# EAGLE board nodemcu (EAGLE 9.5.2)
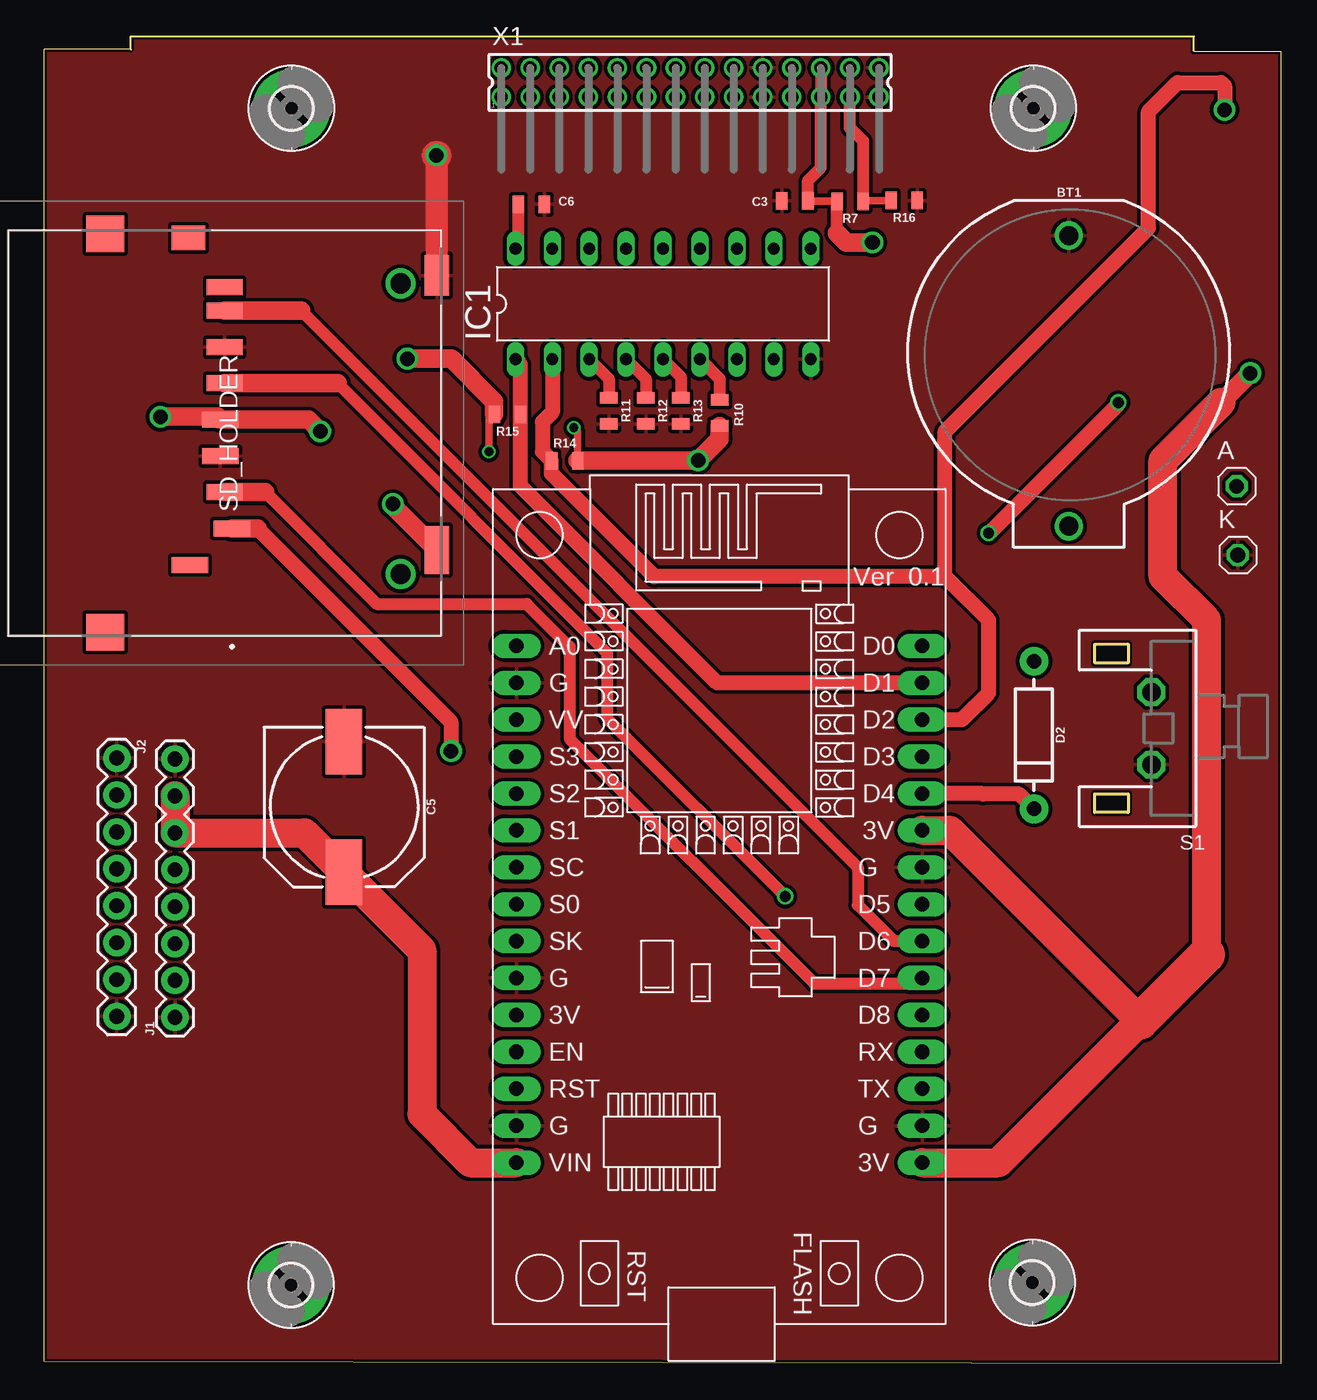
[diagram p0: board, top side]
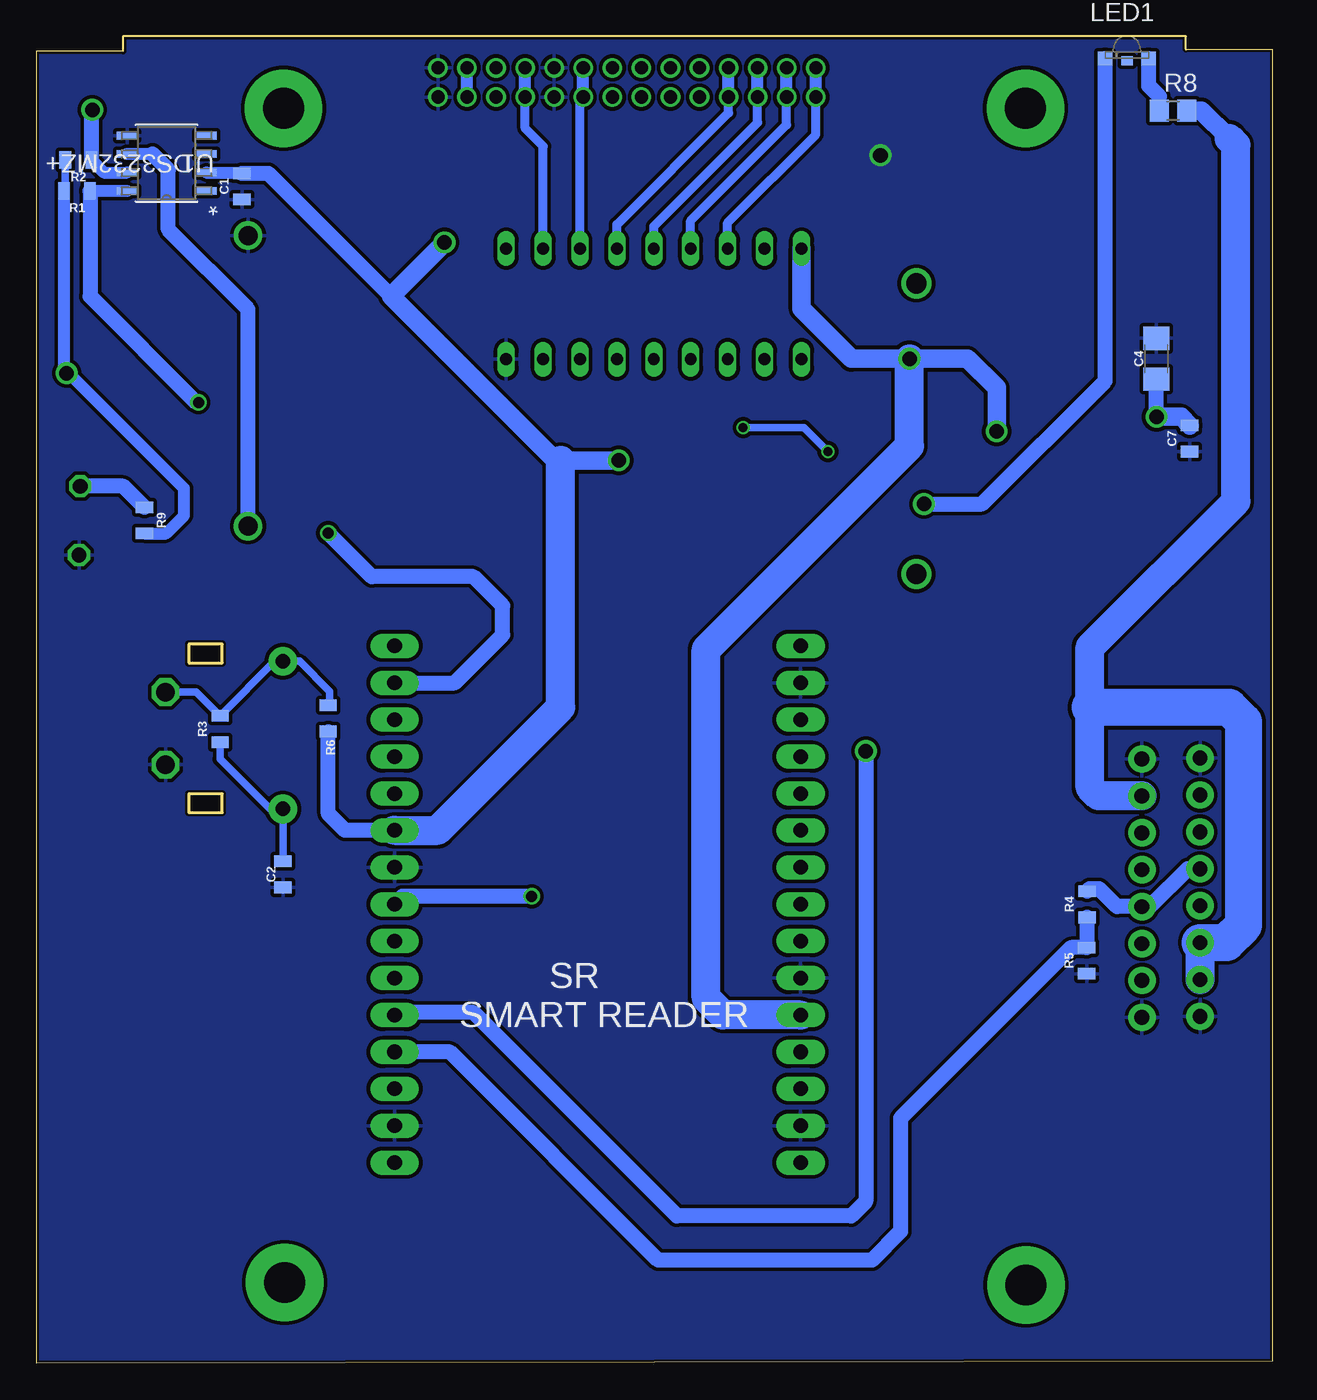
[diagram p1: board, bottom side, seen from below]

Size 85.09 x 91.31 mm. Coordinates in mm from the lower left corner, seen from the top.
Outline: 5.97,91.31 79.12,91.31 79.12,90.3 85.09,90.3 85.09,0 0,0.13 0,90.42 5.97,90.42 5.97,91.31
Copper layers (1*16): Top 0.035mm / dielectric 1.5mm / Bottom 0.035mm
Design rules "SparkFun-2-layer-PCBWay-LIMIT": minimum track width 6mil, minimum drill 0.3mm, track to track 6mil, track to pad 6mil, pad to pad 6mil, via to via 6mil, smd to smd 6mil, copper to edge 6mil, drill to drill 6mil, minimum pad ring 6mil, minimum via ring 6mil, stop-mask expansion 4mil, vias tented up to drill 25mil, thermal gap 10mil
Net classes: 1 signal: width 0.254 mm, drill 0.305 mm, clearance 0.254 mm; 2 power: width 0.508 mm, drill 0.61 mm, clearance 0.254 mm

## Footprints (pad centres in the part's own frame; a part is rotated, then mirrored left to right if it is on the bottom)
1X01 = drill 1.016 octagon: 1 0,0
BATTCOM_20MM_PTH = drill 1.3: 1 11.85,0; 2 -8.15,0
0805 = smd 0.8 x 1.2: 1 -0.9,0; 2 0.9,0
1206 = smd 1.6 x 1.8: 1 -1.4,0; 2 1.4,0
NIC_10X10.5_CAP = smd 4.5 x 2.5: + 4.5,0; - -4.5,0
DIODE-1N4001 = drill 1 pad 1.981: A -5.08,0; C 5.08,0
2,8-PAD = drill 2.8 pad 5.334: B2,8 0,0
DIL18 = drill 0.813 long: 1 -10.16,-3.81; 2 -7.62,-3.81; 3 -5.08,-3.81; 4 -2.54,-3.81; 5 0,-3.81; 6 2.54,-3.81; 7 5.08,-3.81; 8 7.62,-3.81; 9 10.16,-3.81; 10 10.16,3.81; 11 7.62,3.81; 12 5.08,3.81; 13 2.54,3.81; 14 0,3.81; 15 -2.54,3.81; 16 -5.08,3.81; 17 -7.62,3.81; 18 -10.16,3.81
1X08 = drill 1.016 pad 1.88: 1 0,0; 2 2.54,0; 3 5.08,0; 4 7.62,0; 5 10.16,0; 6 12.7,0; 7 15.24,0; 8 17.78,0
OSRAM-SIDELED = smd 1 x 0.9: A 1.5,0; C -1.5,0 | smd 0.8 x 0.6: P$1 0,-0.15
R0805 = smd 1.3 x 1.5: 1 -0.95,0; 2 0.95,0
TL1100C = drill 1.27 octagon: 1 2.5,0; 2 -2.5,0
5009980900 = smd 1.1 x 2.5: 1 -6.575,-0.225; 2 -4.075,0.275; 3 -1.575,0.575; 4 0.925,0.575; 5 3.425,0.275; 6 5.925,0.275; 7 8.425,0.275; 8 10.05,0.275; 9 -9.075,2.675 | smd 1.7 x 2.3: 10 13.425,2.775 | smd 2.8 x 1.7: 11 10.85,-14.325 | smd 3.3 x 1.7: 12 -8.05,-14.325 | smd 2.5 x 2.6: 13 -13.7,8.495; 14 13.7,8.495 | drill 1.39 pad 2.085: 15 -9.7,-11.825; 16 10.3,-11.825
21-0041B_8 = smd 1.455 x 0.543: 1 -2.721,1.905; 2 -2.721,0.635; 3 -2.721,-0.635; 4 -2.721,-1.905; 5 2.721,-1.905; 6 2.721,-0.635; 7 2.721,0.635; 8 2.721,1.905
NODEMCU = drill 1 pad 1.676 long: 1 -13.97,17.78; 2 -13.97,15.24; 3 -13.97,12.7; 4 -13.97,10.16; 5 -13.97,7.62; 6 -13.97,5.08; 7 -13.97,2.54; 8 -13.97,0; 9 -13.97,-2.54; 10 -13.97,-5.08; 11 -13.97,-7.62; 12 -13.97,-10.16; 13 -13.97,-12.7; 14 -13.97,-15.24; 15 -13.97,-17.78; 16 13.97,-17.78; 17 13.97,-15.24; 18 13.97,-12.7; 19 13.97,-10.16; 20 13.97,-7.62; 21 13.97,-5.08; 22 13.97,-2.54; 23 13.97,0; 24 13.97,2.54; 25 13.97,5.08; 26 13.97,7.62; 27 13.97,10.16; 28 13.97,12.7; 29 13.97,15.24; 30 13.97,17.78
332-28 = drill 0.9 pad 1.27: 1 -13,-1; 2 -13,1; 3 -11,-1; 4 -11,1; 5 -9,-1; 6 -9,1; 7 -7,-1; 8 -7,1; 9 -5,-1; 10 -5,1; 11 -3,-1; 12 -3,1; 13 -1,-1; 14 -1,1; 15 1,-1; 16 1,1; 17 3,-1; 18 3,1; 19 5,-1; 20 5,1; 21 7,-1; 22 7,1; 23 9,-1; 24 9,1; 25 11,-1; 26 11,1; 27 13,-1; 28 13,1

## Placement (x,y rotation side)
A  [1X01]  82.07,60.35 0 top
BT1  [BATTCOM_20MM_PTH]  70.52,69.45 270 top
C1  0.1µF  [0805]  70.94,80.99 90 bottom
C2  1uF  [0805]  68.11,33.64 270 bottom
C3  .1uF  [0805]  51.67,79.99 0 top
C4  1.0uF  [1206]  8,69.13 90 bottom
C5  470uF  [NIC_10X10.5_CAP]  20.63,38.28 270 top
C6  0.1uF  [0805]  33.53,79.76 0 top
C7  0.1µF  [0805]  5.71,63.64 90 bottom
D2  1A/50V/1.1V  [DIODE-1N4001]  68.12,43.23 270 top
H1  MOUNT-PAD-ROUND2.8  [2,8-PAD]  17.02,86.36 0 top
H2  MOUNT-PAD-ROUND2.8  [2,8-PAD]  68.07,86.36 0 top
H3  MOUNT-PAD-ROUND2.8  [2,8-PAD]  16.99,5.38 0 top
H4  MOUNT-PAD-ROUND2.8  [2,8-PAD]  68,5.55 0 top
IC1  MCP23008/P  [DIL18]  42.59,72.9 0 top
J1  [1X08]  9,23.8 90 top
J2  [1X08]  5,41.64 270 top
K  [1X01]  82.15,55.61 0 top
LED1  [OSRAM-SIDELED]  10.03,89.79 0 bottom
R1  4k7  [0805]  82.29,80.69 180 bottom
R2  4k7  [0805]  82.2,82.81 180 bottom
R3  4k7  [0805]  72.44,43.64 90 bottom
R4  1K  [0805]  12.78,31.58 90 bottom
R5  2K  [0805]  12.8,27.7 90 bottom
R6  20k  [0805]  65.01,44.37 270 bottom
R7  48.7K  [0805]  55.47,79.96 180 top
R8  330  [R0805]  6.85,86.2 0 bottom
R9  100  [0805]  77.66,58.01 270 bottom
R10  4k7  [0805]  46.48,65.41 90 top
R11  10k  [0805]  38.86,65.53 270 top
R12  10k  [0805]  41.4,65.53 270 top
R13  10k  [0805]  43.81,65.53 270 top
R14  4k7  [0805]  35.81,62.1 0 top
R15  4k7  [0805]  31.88,65.3 180 top
R16  45.3R  [0805]  59.18,80.01 180 top
S1  TL1100C  [TL1100C]  76.2,43.69 90 top
SD_HOLDER  500998-0900  [5009980900]  12.7,64.01 90 top
U1  DS3232MZ+  [21-0041B_8]  76.12,82.58 180 bottom
U$1  NODEMCU  [NODEMCU]  46.46,31.58 0 top
X1  332-28  [332-28]  44.45,88.14 0 top

## Library data of the parts
A K = pinhead
BT1 = SparkFun-Batteries; PROD_ID: BATT-09031; SF_SKU: PRT-00783
C1 C7 = SparkFun-Capacitors; PROD_ID: CAP-08469
C2 C3 C6 = SparkFun-Capacitors; PROD_ID: CAP-08064
C4 = SparkFun-Capacitors; PROD_ID: CAP-09822
C5 = SparkFun-Capacitors; PROD_ID: CAP-08362
D2 = SparkFun-DiscreteSemi; PROD_ID: DIO-09176
H1-H4 = holes
IC1 LED1 = adafruit
J1 J2 = SparkFun-Connectors; PROD_ID: CONN-08438
R1-R7 R9-R16 = SparkFun-Resistors; PROD_ID: RES-09883
R8 = rcl; SPICEPREFIX: R
S1 = switch-e-switch
SD_HOLDER = SamacSys_Parts; ALLIED_NUMBER: 70266950; ALLIED_PRICE-STOCK: https://www.alliedelec.com/molex-incorporated-500998-0900/70266950/; DESCRIPTION: 9 way normal mount SD card connector 9 way normal mount SD card connector; HEIGHT: 3mm; MANUFACTURER_NAME: Molex; MANUFACTURER_PART_NUMBER: 500998-0900; MOUSER_PART_NUMBER: 538-500998-0900; MOUSER_PRICE-STOCK: https://www.mouser.com/Search/Refine.aspx?Keyword=538-500998-0900; RS_PART_NUMBER: 4879327; RS_PRICE-STOCK: http://uk.rs-online.com/web/p/products/4879327
U1 = ds3232; BUILT_BY: EMA_UL_Team; MANUFACTURER_PART_NUMBER: DS3232MZ+; VENDOR: Maxim Integrated Products
U$1 = nodemcu
X1 = con-garry

## Nets
3.3V [power]: C1.2 C3.2 C4.1 C6.1 C7.2 IC1.18 R1.2 R2.2 R6.2 R7.2 R9.2 R10.1 R14.2 R15.2 SD_HOLDER.4 U1.2 U$1.11 U$1.16 U$1.25 X1.23 X1.24
BUTTON [power]: C2.1 D2.C R3.1 U$1.26
CLK [signal]: SD_HOLDER.5 U$1.23
CS [signal]: SD_HOLDER.1 U$1.20
D4_LCD [signal]: IC1.13 X1.7 X1.8
D5_LCD [signal]: IC1.14 X1.5 X1.6
D6_LCD [signal]: IC1.15 X1.3 X1.4
D7_LCD [signal]: IC1.16 X1.1 X1.2
EN_LCD [signal]: IC1.12 X1.17 X1.18
ESP_RX [signal]: R4.1 R5.2 U$1.19
GND [power]: BT1.2 C1.1 C2.2 C3.1 C4.2 C5.- C6.2 C7.1 IC1.9 J1.1 J1.8 J2.1 J2.8 K.1 R5.1 R11.2 R12.2 R13.2 R16.1 S1.2 SD_HOLDER.3 SD_HOLDER.6 SD_HOLDER.11 U1.5 U$1.2 U$1.10 U$1.14 U$1.17 U$1.24 X1.19 X1.20 X1.27 X1.28
MISO [signal]: SD_HOLDER.7 U$1.22
MOSI [signal]: SD_HOLDER.2 U$1.21
N$1: D2.A R3.2 R6.1 S1.1
N$3 [power]: A.1 R9.1
N$4: IC1.6 R10.2
N$5: IC1.3 R11.1
N$6 [signal]: R7.1 R16.2 X1.25 X1.26
N$7: IC1.4 R12.1
N$8: IC1.5 R13.1
N$25: LED1.C SD_HOLDER.12
N$31 [power]: LED1.A R8.1
RS [signal]: IC1.11 X1.21 X1.22
SCL [signal]: IC1.1 R1.1 R15.1 U1.8 U$1.29
SDA [signal]: IC1.2 R2.1 R14.1 U1.7 U$1.28
TX_MIDMARK [power]: J1.4 J2.4 R4.2
VBAT [power]: BT1.1 U1.6
VCC [power]: C5.+ J1.6 J1.7 J2.6 J2.7 R8.2 U$1.15

## Tracks (layer width: path | path; a pad name or v marks a point on that pad's centre or on a via)
3.3V  (via drill 0.61, 1)
  Top 0.508: 32.63,76.9 IC1.18 | R15.2 30.61,64.93 v30.61,62.74 | v36.45,64.39 36.71,64.12 R14.2 | C3.2 52.6,79.96 R7.2
  Top 0.813: C6.1 32.63,76.9 | X1.24 X1.23 53.45,82.28 52.57,81.39 C3.2 | 54.57,77.77 R7.2
  Top 1.27: v83,68.13 81,66.13 | v57,77.13 55.21,77.13 54.57,77.77 | R14.2 36.74,62.13 v45,62.13 46.48,63.61 R10.1 | v25,69.13 28.03,69.13 30.98,66.18 R15.2 | v19,64.13 18.19,64.93 SD_HOLDER.4 11.93,65.13 v8,65.13
  Top 2: U$1.16 65.68,13.8 75.43,23.55 62.32,36.66 U$1.25 | 81,66.13 77,62.13 77,54.13 80,51.13 80,28.13
  Top 2.54: 75.43,23.55 80,28.13
  Bottom 0.508: v36.45,64.39 32.26,64.39 v30.61,62.74 | R2.2 83.1,80.77
  Bottom 0.61: R1.2 83.1,80.77 | 83.19,68.31 v83,68.13
  Bottom 0.813: U1.2 71,81.94 C1.2 | R1.2 83.19,68.31 83.05,68.31 74.93,60.2 74.93,58.33 76.16,57.11 R9.2
  Bottom 1.016: U$1.25 63.84,36.66 65.01,37.83 R6.2 | 60.68,73.44 69.13,81.89 C1.2 | v8,65.13 C4.1
  Bottom 1.27: v57,77.13 60.68,73.44 49,61.76 | 49,62.13 v45,62.13 | v19,64.13 19,67.13 21,69.13 v25,69.13 29,69.13 32.43,72.56 IC1.18 | C7.2 6.3,65.13 v8,65.13
  Bottom 2: U$1.25 57.46,36.66 49,45.13 49,61.76 49,62.13 | U$1.11 37.84,23.96 39,25.13 39,49.13 25,63.13 v25,69.13
BUTTON
  Top 0.508: 64.62,39.16 64.58,39.2
  Top 1.016: D2.C 67.11,39.16 64.62,39.16 | 64.58,39.2 U$1.26
  Bottom 0.508: R3.1 72.44,41.57 69,38.13 68.14,38.13 | 68.14,38.13 D2.C | C2.1 68.11,38.09 68.14,38.13
CLK  (via drill 0.75)
  Top 0.813: 20.2,67.43 38.75,48.88 38.75,44.38 v51,32.13
  Top 1.27: SD_HOLDER.5 20.2,67.43
  Bottom 1.016: v51,32.13 59.89,32.13 U$1.23
CS  (via drill 1)
  Top 1.016: 14.7,57.43 28,44.14 v28,42.13
  Top 1.27: SD_HOLDER.1 14.7,57.43
  Bottom 1.016: v28,42.13 28,11.13 29,10.13 41,10.13 55,24.13 60.27,24.13 U$1.20
D4_LCD
  Bottom 0.61: IC1.13 45.13,78.36 37.45,86.04 X1.7
  Bottom 0.813: X1.7 X1.8
D5_LCD
  Bottom 0.61: IC1.14 42.59,78.23 35.45,85.38 X1.5
  Bottom 0.813: X1.5 X1.6
D6_LCD
  Bottom 0.61: IC1.15 40.05,78.61 33.45,85.22 X1.3
  Bottom 0.813: X1.3 X1.4
D7_LCD
  Bottom 0.61: IC1.16 37.51,78.49 31.45,84.55 X1.1
  Bottom 0.813: X1.1 X1.2
EN_LCD
  Bottom 0.61: IC1.12 47.67,86.91 X1.17
  Bottom 0.813: X1.17 X1.18
ESP_RX
  Bottom 1.016: R4.1 12.8,30.66 R5.2 13.86,28.6 25.61,16.85 25.61,9.07 27.57,7.1 42.29,7.1 56.62,21.42 U$1.19
GND  (via drill 1)
  Top 1.5: SD_HOLDER.11 27.02,83.1
  Top 2: 27.02,83.1 v27,83.13
  pour Top: -2,96.13 94,96.13 94,-5.87 -6,-5.87 -7,-4.87 -7,96.13
  pour Bottom: -7,96.13 94,96.13 94,-5.87 -6,-5.87 -7,-4.87
MISO
  Top 0.813: U$1.22 58.48,29.04 56,31.52 56,34.13 17.69,72.43
  Top 1.27: SD_HOLDER.7 17.69,72.43
MOSI
  Top 0.813: 15.19,59.93 22.87,52.25 33.21,52.25 36.17,49.3 36.17,42.96 53,26.13 60.06,26.13 U$1.21
  Top 1.27: SD_HOLDER.2 15.19,59.93
N$1
  Bottom 0.508: S1.1 74.08,46.19 R3.2 68.68,48.31 D2.A 66.97,48.31 64.9,46.23 64.9,45.38 R6.1
N$3
  Bottom 1.016: R9.1 79.1,60.35 A.1
N$4
  Top 0.813: IC1.6 46.48,67.74 R10.2
N$5
  Top 0.813: IC1.3 38.86,67.74 R11.1
N$6
  Top 0.508: R16.2 56.42,80.01 R7.1
  Top 0.813: R7.1 56.37,84.1 55.45,85.01 X1.25
  Bottom 0.813: X1.25 X1.26
N$7
  Top 0.813: IC1.4 41.4,67.74 R12.1
N$8
  Top 0.813: IC1.5 43.81,67.87 R13.1
N$25  (via drill 1)
  Top 0.813: 24,58.98 v24,59.13
  Top 1.27: SD_HOLDER.12 24,58.98
  Bottom 1.016: v24,59.13 20,59.13 11.53,67.59 LED1.C
N$31
  Bottom 1.016: R8.1 7.8,87.17 8.53,87.91 LED1.A
RS
  Bottom 0.61: IC1.11 50.21,83.74 51.45,84.98 X1.21
  Bottom 0.813: X1.21 X1.22
SCL  (via drill 0.75)
  Top 1.016: IC1.1 32.78,68.74 R15.1 32.78,60.35 46.3,46.82 U$1.29 | v73.93,66.12 73.93,66.01 65.05,57.13 v65,57.13
  Bottom 0.508: R1.1 81.38,80.67
  Bottom 0.813: 81.38,80.67 U1.8
  Bottom 1.016: R1.1 81.39,73.42 74.09,66.12 v73.93,66.12 | v65,57.13 62,54.13 55,54.13 53,52.13 53,50.13 56.3,46.82 U$1.29
SDA  (via drill 1)
  Top 1.016: U$1.28 63.16,44.28 65,46.13 65,51.13 62,54.13 | 62,54.13 42,54.13 34.91,61.21 R14.1 34.29,62.73 34.29,64.77 34.97,65.45 IC1.2 | 62,54.13 62,64.13 76,78.13 76,86.13 78,88.13 81,88.13 81.24,87.89 v81.24,86.25
  Bottom 0.813: R2.1 80.44,81.94 U1.7
  Bottom 1.016: v81.24,86.25 81.3,86.19 R2.1
TX_MIDMARK
  Bottom 1.016: R4.2 12.62,32.64 11.94,32.64 10.72,31.42 J1.4 8.46,31.42 5.86,34.02 J2.4
VBAT
  Bottom 0.813: 77.09,83.21 U1.6
  Bottom 1.016: BT1.1 70.52,72.53 76,78.02 76,82.13 77.09,83.21
VCC
  Top 2: U$1.15 29.32,13.8 26,17.13 26,28.41 C5.+ 17.91,36.5 J1.6 J1.7
  Bottom 1.27: R8.2 4.9,86.2 3,84.3
  Bottom 2: J1.7 11.99,39.04 12.57,39.62 12.57,45.13 12.57,49.28 2.54,59.31 2.54,83.84 3,84.3 | J2.7 J2.6
  Bottom 2.54: J2.6 3.19,28.94 2,30.13 2,44.13 3,45.13 12.57,45.13

## Text on the board
bPlace: SR / SMART READER